# EAGLE board CT_schematic (EAGLE 7.6.0)

Size 100 x 80 mm. Coordinates in mm from the lower left corner, seen from the top.
Outline: 0,0 100,0 100,80 0,80 0,0
Copper layers (1*16): Top 0.035mm / dielectric 1.5mm / Bottom 0.035mm
Design rules "default": minimum track width 10mil, minimum drill 24mil, track to track 8mil, track to pad 8mil, pad to pad 8mil, via to via 8mil, smd to smd 8mil, copper to edge 40mil, drill to drill 8mil, minimum pad ring 10mil, minimum via ring 8mil, stop-mask expansion 4mil, vias tented up to drill 0mil, thermal gap 10mil

## Footprints (pad centres in the part's own frame; a part is rotated, then mirrored left to right if it is on the bottom)
C0603 = smd 0.8 x 0.8: 1 -0.762,0; 2 0.762,0
C0402 = smd 0.5 x 0.5: 1 -0.508,0; 2 0.508,0
C0805 = smd 1.2 x 1.3: 1 -1.016,0; 2 1.016,0
C1210 = smd 1.2 x 2.5: 1 -1.524,0; 2 1.524,0
R0603 = smd 0.8 x 0.8: 1 -0.762,0; 2 0.762,0
EXV-9H = smd 3.505 x 1.676: 1 -2.857,0; 2 2.857,0
L0603 = smd 0.8 x 0.8: 1 -0.762,0; 2 0.762,0
L1210 = smd 1.2 x 2.5: 1 -1.524,0; 2 1.524,0
PJ-037B_PACKAGE = drill 3.7 square: 1 12,0 | drill 3.2 square: 2 6,0
LQFP100 = smd 0.3 x 1.2: 1 -6,-7.75; 2 -5.5,-7.75; 3 -5,-7.75; 4 -4.5,-7.75; 5 -4,-7.75; 6 -3.5,-7.75; 7 -3,-7.75; 8 -2.5,-7.75; 9 -2,-7.75; 10 -1.5,-7.75; 11 -1,-7.75; 12 -0.5,-7.75; 13 0,-7.75; 14 0.5,-7.75; 15 1,-7.75; 16 1.5,-7.75; 17 2,-7.75; 18 2.5,-7.75; 19 3,-7.75; 20 3.5,-7.75; 21 4,-7.75; 22 4.5,-7.75; 23 5,-7.75; 24 5.5,-7.75; 25 6,-7.75; 51 6,7.75; 52 5.5,7.75; 53 5,7.75; 54 4.5,7.75; 55 4,7.75; 56 3.5,7.75; 57 3,7.75; 58 2.5,7.75; 59 2,7.75; 60 1.5,7.75; 61 1,7.75; 62 0.5,7.75; 63 0,7.75; 64 -0.5,7.75; 65 -1,7.75; 66 -1.5,7.75; 67 -2,7.75; 68 -2.5,7.75; 69 -3,7.75; 70 -3.5,7.75; 71 -4,7.75; 72 -4.5,7.75; 73 -5,7.75; 74 -5.5,7.75; 75 -6,7.75 | smd 1.2 x 0.3: 26 7.75,-6; 27 7.75,-5.5; 28 7.75,-5; 29 7.75,-4.5; 30 7.75,-4; 31 7.75,-3.5; 32 7.75,-3; 33 7.75,-2.5; 34 7.75,-2; 35 7.75,-1.5; 36 7.75,-1; 37 7.75,-0.5; 38 7.75,0; 39 7.75,0.5; 40 7.75,1; 41 7.75,1.5; 42 7.75,2; 43 7.75,2.5; 44 7.75,3; 45 7.75,3.5; 46 7.75,4; 47 7.75,4.5; 48 7.75,5; 49 7.75,5.5; 50 7.75,6; 76 -7.75,6; 77 -7.75,5.5; 78 -7.75,5; 79 -7.75,4.5; 80 -7.75,4; 81 -7.75,3.5; 82 -7.75,3; 83 -7.75,2.5; 84 -7.75,2; 85 -7.75,1.5; 86 -7.75,1; 87 -7.75,0.5; 88 -7.75,0; 89 -7.75,-0.5; 90 -7.75,-1; 91 -7.75,-1.5; 92 -7.75,-2; 93 -7.75,-2.5; 94 -7.75,-3; 95 -7.75,-3.5; 96 -7.75,-4; 97 -7.75,-4.5; 98 -7.75,-5; 99 -7.75,-5.5; 100 -7.75,-6
SAMTEC_FTSH-105-01-L-DV-K = smd 0.762 x 2.794: 1 -2.54,-2.032; 2 -2.54,2.032; 3 -1.27,-2.032; 4 -1.27,2.032; 5 0,-2.032; 6 0,2.032; 7 1.27,-2.032; 8 1.27,2.032; 9 2.54,-2.032; 10 2.54,2.032
SSOP-16 = smd 1.981 x 0.356: 1 -2.464,2.223; 2 -2.464,1.587; 3 -2.464,0.953; 4 -2.464,0.318; 5 -2.464,-0.318; 6 -2.464,-0.953; 7 -2.464,-1.587; 8 -2.464,-2.223; 9 2.464,-2.223; 10 2.464,-1.587; 11 2.464,-0.953; 12 2.464,-0.318; 13 2.464,0.318; 14 2.464,0.953; 15 2.464,1.587; 16 2.464,2.223
182-009-MALE = drill 1.194 pad 1.524 octagon: 1 -5.537,10.923; 2 -2.769,10.923; 3 0,10.923; 4 2.769,10.923; 5 5.537,10.923; 6 -4.153,8.08; 7 -1.384,8.08; 8 1.384,8.08; 9 4.153,8.08 | hole 3.048: -12.446,9.501; 12.446,9.501
M41T65_QFN-16 = smd 0.775 x 0.305: 1 -1.387,0.75; 2 -1.387,0.25; 3 -1.387,-0.25; 4 -1.387,-0.75; 9 1.387,-0.75; 10 1.387,-0.25; 11 1.387,0.25; 12 1.387,0.75 | smd 0.305 x 0.775: 5 -0.75,-1.387; 6 -0.25,-1.387; 7 0.25,-1.387; 8 0.75,-1.387; 13 0.75,1.387; 14 0.25,1.387; 15 -0.25,1.387; 16 -0.75,1.387 | smd 1.6 x 1.6: 17 0,0
SI7034-A10-IM = smd 0.75 x 0.4: 1 -1,0.5; 2 -1,-0.5; 4 1,-0.5; 5 1,0.5 | smd 0.8 x 1.7: 3 0,0
FCI_10118193-0001LF = smd 0.4 x 1.35: 1 -1.3,2.675; 2 -0.65,2.675; 3 0,2.675; 4 0.65,2.675; 5 1.3,2.675 | smd 1.6 x 1.4: 6 -3.2,2.45; 7 3.2,2.45 | smd 1.9 x 1.9: 8 -1.2,0; 9 1.2,0 | hole 0.5: -3.3,0; 3.3,0
SOT143B = smd 1 x 0.7: 1 -0.75,-1 | smd 0.6 x 0.7: 2 0.95,-1; 3 0.95,1; 4 -0.95,1
ABS07-32.768KHZ-7-T = smd 1.1 x 2.4: 1 -2.5,0; 2 0,0
ASFL1 = smd 1.7 x 1.5: 1 -1.27,-1.1; 2 1.27,-1.1; 3 1.27,1.1; 4 -1.27,1.1
WSON-8 = smd 0.3 x 0.6: 1 -0.75,0; 2 0.05,0; 3 0.85,0; 4 1.65,0; 5 1.65,3.8; 6 0.85,3.8; 7 0.05,3.8; 8 -0.75,3.8 | smd 3 x 2.6: PAD 0.45,1.9
SON-6 = smd 0.55 x 0.3: 1 -0.355,0.5 | smd 0.52 x 0.3: 2 -0.37,0; 3 -0.37,-0.5; 4 0.37,-0.5; 5 0.37,0; 6 0.37,0.5
SW_4-1437565-2 = smd 1.4 x 2.1: 1 -2.23,4.55; 2 -2.23,-4.55; 3 2.23,4.55; 4 2.23,-4.55
LGM67K-G1J2-24-Z = smd 0.8 x 1.4: A -2,0; C 0,0
NC7SZ125M5X = smd 1.3 x 0.7: 1 -1.3,0.95; 2 -1.3,0; 3 -1.3,-0.95; 4 1.3,-0.95; 5 1.3,0.95

## Placement (x,y rotation side)
C1  1e-07  [C0603]  -62.23,74.93 0 top  (outside the outline)
C2  1e-07  [C0603]  -66.04,74.93 0 top  (outside the outline)
C3  1e-07  [C0603]  -69.85,74.93 0 top  (outside the outline)
C4  1e-07  [C0603]  -73.66,74.93 0 top  (outside the outline)
C5  1e-07  [C0603]  -77.47,74.93 0 top  (outside the outline)
C6  4.7e-06  [C0603]  -54.61,74.93 0 top  (outside the outline)
C7  1e-07  [C0603]  -15.24,80.01 0 top  (outside the outline)
C8  1e-08  [C0603]  -19.05,80.01 0 top  (outside the outline)
C9  1e-06  [C0603]  -22.86,80.01 0 top  (outside the outline)
C10  1e-11  [C0402]  -15.24,85.09 0 top  (outside the outline)
C11  1e-11  [C0402]  -19.05,85.09 0 top  (outside the outline)
C12  1e-07  [C0402]  -22.86,85.09 0 top  (outside the outline)
C13  1e-06  [C0603]  -26.67,80.01 0 top  (outside the outline)
C14  1e-06  [C0603]  -30.48,80.01 0 top  (outside the outline)
C15  2.2e-07  [C0603]  -58.42,74.93 0 top  (outside the outline)
C16  1e-06  [C0603]  -34.29,80.01 0 top  (outside the outline)
C17  1e-06  [C0603]  -38.1,80.01 0 top  (outside the outline)
C18  4.7e-06  [C0805]  -34.29,68.58 0 top  (outside the outline)
C19  1e-07  [C0402]  -26.67,85.09 0 top  (outside the outline)
C20  1e-08  [C0402]  -30.48,85.09 0 top  (outside the outline)
C21  1e-08  [C0402]  -34.29,85.09 0 top  (outside the outline)
C22  1e-05  [C1210]  -67.31,60.96 0 top  (outside the outline)
C23  1e-05  [C0805]  -39.37,68.58 0 top  (outside the outline)
C24  8e-07  [R0603]  -41.91,80.01 0 top  (outside the outline)
C25  1e-05  [C1210]  -73.66,60.96 0 top  (outside the outline)
C26  1e-07  [C0402]  -38.1,85.09 0 top  (outside the outline)
C27  0.0001  [EXV-9H]  -45.72,53.34 0 top  (outside the outline)
C28  0.0001  [EXV-9H]  -57.15,53.34 0 top  (outside the outline)
C29  1e-08  [C0402]  -41.91,85.09 0 top  (outside the outline)
C30  1e-08  [C0402]  -45.72,85.09 0 top  (outside the outline)
F1  240.0  [L0603]  -45.72,80.01 0 top  (outside the outline)
I1  1e-05  [L1210]  -16.51,68.58 0 top  (outside the outline)
J1  PJ-037B  [PJ-037B_PACKAGE]  -57.15,29.21 0 top  (outside the outline)
R2  1000.0  [R0603]  -49.53,80.01 0 top  (outside the outline)
R4  4700.0  [R0603]  -53.34,80.01 0 top  (outside the outline)
R5  2200.0  [R0603]  -57.15,80.01 0 top  (outside the outline)
R6  2200.0  [R0603]  -60.96,80.01 0 top  (outside the outline)
R7  2200.0  [R0603]  -64.77,80.01 0 top  (outside the outline)
R8  2200.0  [R0603]  -68.58,80.01 0 top  (outside the outline)
R9  10000.0  [R0603]  -80.01,68.58 0 top  (outside the outline)
R10  10000.0  [R0603]  -15.24,74.93 0 top  (outside the outline)
R11  10000.0  [R0603]  -20.32,74.93 0 top  (outside the outline)
R12  10000.0  [R0603]  -25.4,74.93 0 top  (outside the outline)
R13  5.0  [R0603]  -72.39,80.01 0 top  (outside the outline)
R14  100000.0  [R0603]  -49.53,68.58 0 top  (outside the outline)
R15  10000.0  [R0603]  -30.48,74.93 0 top  (outside the outline)
R16  10000.0  [R0603]  -35.56,74.93 0 top  (outside the outline)
R17  100000.0  [R0603]  -54.61,68.58 0 top  (outside the outline)
R18  806.0  [R0603]  -76.2,80.01 0 top  (outside the outline)
R19  1000.0  [R0603]  -80.01,80.01 0 top  (outside the outline)
R20  100000.0  [R0603]  -59.69,68.58 0 top  (outside the outline)
R21  153694.38  [R0603]  -44.45,68.58 0 top  (outside the outline)
R22  100000.0  [R0603]  -64.77,68.58 0 top  (outside the outline)
R23  10000.0  [R0603]  -40.64,74.93 0 top  (outside the outline)
R24  10000.0  [R0603]  -45.72,74.93 0 top  (outside the outline)
R25  82000.0  [R0603]  -50.8,74.93 0 top  (outside the outline)
R26  300000.0  [R0603]  -69.85,68.58 0 top  (outside the outline)
R27  120000.0  [R0603]  -74.93,68.58 0 top  (outside the outline)
U1  STM32L151VBT6  [LQFP100]  -63.5,8.89 0 top  (outside the outline)
U2  FTSH-105-01-L-DV-K  [SAMTEC_FTSH-105-01-L-DV-K]  -35.56,30.48 0 top  (outside the outline)
U3  LTC2804CGN-1#PBF  [SSOP-16]  -29.21,43.18 0 top  (outside the outline)
U4  182-009-113R531  [182-009-MALE]  -36.83,6.35 0 top  (outside the outline)
U5  M41T65Q6F  [M41T65_QFN-16]  -50.8,85.09 0 top  (outside the outline)
U6  Si7034-A10-IM  [SI7034-A10-IM]  -69.85,83.82 0 top  (outside the outline)
U7  10118193-0001LF  [FCI_10118193-0001LF]  -35.56,52.07 0 top  (outside the outline)
U8  prtr5v0u2ax  [SOT143B]  -66.04,85.09 0 top  (outside the outline)
U9  ABS07-32.768KHZ-7-T  [ABS07-32.768KHZ-7-T]  -27.94,62.23 0 top  (outside the outline)
U10  ABS07-32.768KHZ-7-T  [ABS07-32.768KHZ-7-T]  -46.99,62.23 0 top  (outside the outline)
U11  ASFL1-25MHZ-NCS  [ASFL1]  -26.67,53.34 0 top  (outside the outline)
U12  LP3878SDX-ADJ/NOPB  [WSON-8]  -50.8,40.64 0 top  (outside the outline)
U13  LP2951ACSDX/NOPB  [WSON-8]  -68.58,40.64 0 top  (outside the outline)
U14  TPS3895ADRYR  [SON-6]  -73.66,83.82 0 top  (outside the outline)
U15  4-1437565-2  [SW_4-1437565-2]  -73.66,27.94 0 top  (outside the outline)
U16  Q65110A2395  [LGM67K-G1J2-24-Z]  -55.88,60.96 0 top  (outside the outline)
U17  nc7sz125m5x  [NC7SZ125M5X]  -21.59,68.58 0 top  (outside the outline)
U18  nc7sz125m5x  [NC7SZ125M5X]  -27.94,68.58 0 top  (outside the outline)

## Library data of the parts
C1-C30 F1 I1 J1 R2 R4-R27 U1-U18 = circuit_tree

## Nets
CLK_CRYSTAL_U1_8: C10.1 U1.8 U10.1
CLK_CRYSTAL_U1_9: C11.1 U1.9 U10.2
CLK_CRYSTAL_U5_1: U5.1 U9.1
CLK_CRYSTAL_U5_2: U5.2 U9.2
CLK_U1_12: U1.12 U11.3
GND: C1.2 C2.2 C3.2 C4.2 C5.2 C6.2 C7.2 C8.2 C9.2 C10.2 C11.2 C12.2 C13.2 C14.2 C16.2 C17.2 C18.2 C19.2 C20.2 C21.2 C22.2 C23.2 C24.2 C25.2 C26.2 C27.2 C28.2 C29.2 C30.2 J1.2 R2.2 R9.2 R13.2 R19.2 R22.2 R25.2 R27.2 U1.10 U1.19 U1.20 U1.27 U1.49 U1.74 U1.99 U2.3 U2.5 U3.8 U4.5 U5.3 U5.5 U5.17 U6.5 U7.5 U7.6 U7.7 U7.8 U7.9 U8.1 U11.2 U12.3 U12.PAD U13.3 U13.4 U13.PAD U14.2 U16.C U17.2 U17.3 U18.1 U18.3
NET_U1_6: C7.1 U1.6
NET_U1_14: R4.1 U1.14 U18.4
NET_U1_22: C8.1 C9.1 F1.1 U1.21 U1.22
NET_U1_47: R7.1 U1.47 U6.2
NET_U1_48: R8.1 U1.48 U6.4
NET_U1_92: R5.1 U1.92 U5.10
NET_U1_93: R6.1 U1.93 U5.9
NET_U1_94: R9.1 U1.94
NET_U1_97: U16.A
NET_U1_98: U15.3 U15.4
NET_U2_9: R13.1 U2.9
NET_U3_6: C13.1 U3.6
NET_U3_7: C15.1 I1.2 U3.7
NET_U3_9: C14.1 U3.9
NET_U3_10: C15.2 U3.10
NET_U3_11: R14.1 U3.11
NET_U4_2: U3.1 U4.2
NET_U4_3: U3.3 U4.3
NET_U4_7: U3.2 U4.7
NET_U4_8: U3.4 U4.8
NET_U5_4: R15.1 U5.4
NET_U5_11: R16.1 U5.11
NET_U8_4: U7.1 U8.4
NET_U12_1: C21.1 U12.1
NET_U12_6: R18.2 R19.1 U12.6
NET_U12_8: R17.1 U12.8
NET_U13_5: R20.1 U13.5
NET_U13_7: R21.2 R22.1 U13.7
NET_U14_1: R24.1 R25.1 U14.1
NET_U14_3: R26.2 R27.1 U14.3
NET_U14_4: R23.1 U14.4 U17.4 U18.2
NET_U15_1: R2.1 U15.1 U15.2
PROC_SYS_JTCK_SWCLK: R11.1 U1.76 U2.4
PROC_SYS_JTDO_TRACESWO: U1.89 U2.6
PROC_SYS_JTMS_SWDIO: R12.1 U1.72 U2.2
PROC_USART2_CTS: U1.23 U3.13
PROC_USART2_RTS: U1.24 U3.15
PROC_USART2_RX: U1.26 U3.16
PROC_USART2_TX: U1.25 U3.14
PROC_USB_DM: U1.70 U7.2 U8.3
PROC_USB_DP: U1.71 U7.3 U8.2
RST_OUT_U2_JTAG_RST_B: R10.1 U2.10 U17.1
VCC_S1_15V1: C22.1 C24.1 C27.1 C28.1 J1.1 R17.2 U12.4 U13.8
VCC_TIER1_1V8: C1.1 C2.1 C3.1 C4.1 C5.1 C6.1 C12.1 C16.1 C17.1 C18.1 C19.1 C23.1 C26.1 C29.1 C30.1 F1.2 I1.1 R4.2 R5.2 R6.2 R7.2 R8.2 R10.2 R11.2 R12.2 R14.2 R15.2 R16.2 R18.1 R23.2 R24.2 R26.1 U1.11 U1.28 U1.50 U1.75 U1.100 U2.1 U3.5 U3.12 U5.14 U6.1 U12.5 U14.6 U17.5 U18.5
VCC_TIER1_3V3: C20.1 C25.1 R20.2 R21.1 U11.4 U13.1

## Tracks (layer width: path | path; a pad name or v marks a point on that pad's centre or on a via)
CLK_CRYSTAL_U1_8  (2 unrouted)
CLK_CRYSTAL_U1_9  (2 unrouted)
CLK_CRYSTAL_U5_1  (1 unrouted)
CLK_CRYSTAL_U5_2  (1 unrouted)
CLK_U1_12  (1 unrouted)
GND  (69 unrouted)
NET_U1_6  (1 unrouted)
NET_U1_14  (2 unrouted)
NET_U1_22  (4 unrouted)
NET_U1_47  (2 unrouted)
NET_U1_48  (2 unrouted)
NET_U1_92  (2 unrouted)
NET_U1_93  (2 unrouted)
NET_U1_94  (1 unrouted)
NET_U1_98  (1 unrouted)
NET_U2_9  (1 unrouted)
NET_U3_6  (1 unrouted)
NET_U3_7  (2 unrouted)
NET_U3_9  (1 unrouted)
NET_U3_10  (1 unrouted)
NET_U3_11  (1 unrouted)
NET_U4_2  (1 unrouted)
NET_U4_3  (1 unrouted)
NET_U4_7  (1 unrouted)
NET_U4_8  (1 unrouted)
NET_U5_4  (1 unrouted)
NET_U5_11  (1 unrouted)
NET_U8_4  (1 unrouted)
NET_U12_1  (1 unrouted)
NET_U12_6  (2 unrouted)
NET_U12_8  (1 unrouted)
NET_U13_5  (1 unrouted)
NET_U13_7  (2 unrouted)
NET_U14_1  (2 unrouted)
NET_U14_3  (2 unrouted)
NET_U14_4  (3 unrouted)
NET_U15_1  (2 unrouted)
PROC_SYS_JTCK_SWCLK  (2 unrouted)
PROC_SYS_JTDO_TRACESWO  (1 unrouted)
PROC_SYS_JTMS_SWDIO  (2 unrouted)
PROC_USART2_CTS  (1 unrouted)
PROC_USART2_RTS  (1 unrouted)
PROC_USART2_RX  (1 unrouted)
PROC_USART2_TX  (1 unrouted)
PROC_USB_DM  (2 unrouted)
PROC_USB_DP  (2 unrouted)
RST_OUT_U2_JTAG_RST_B  (2 unrouted)
VCC_S1_15V1  (7 unrouted)
VCC_TIER1_1V8  (45 unrouted)
VCC_TIER1_3V3  (5 unrouted)